# Altium PCB Power Board rev5.PcbDoc (part 1 of 2)
Units mil, origin at the board's own origin, x right, y up, seen from the top; angles counter-clockwise.
Board outline 3457.32 x 5639.92 mil, 2 copper layers (Top Layer, Bottom Layer); 95 components, 85 nets, 338 pads, 132 vias.
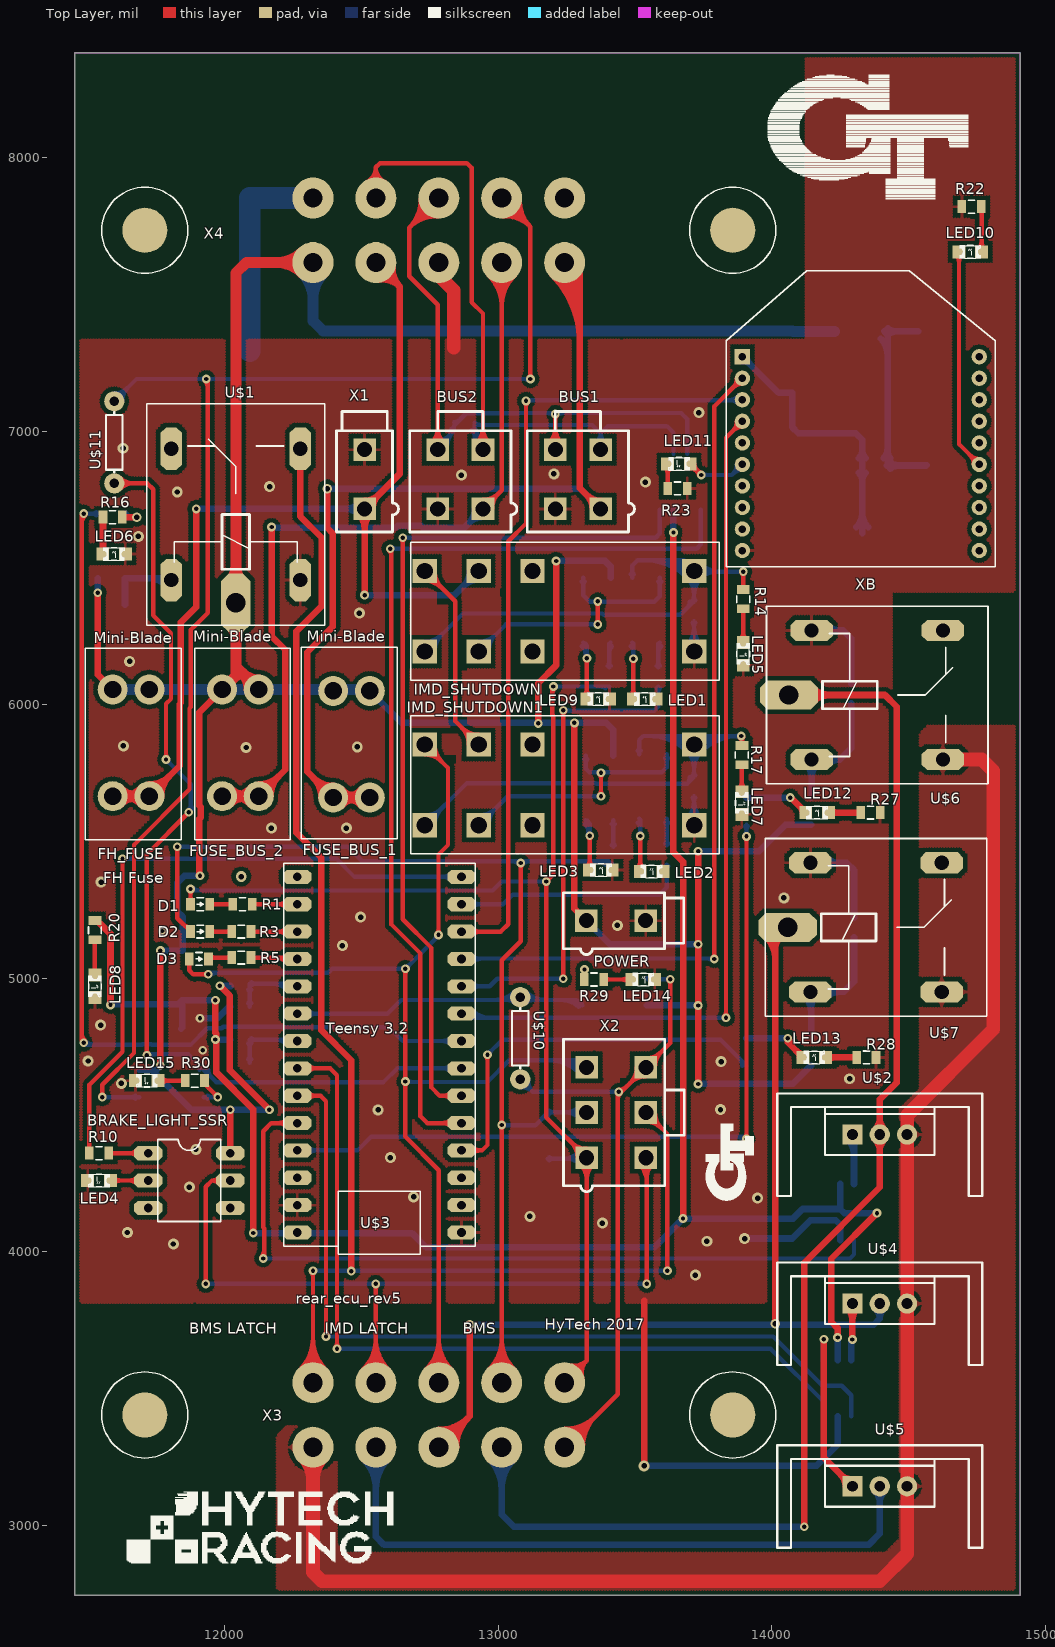
[diagram p0: Top Layer view]
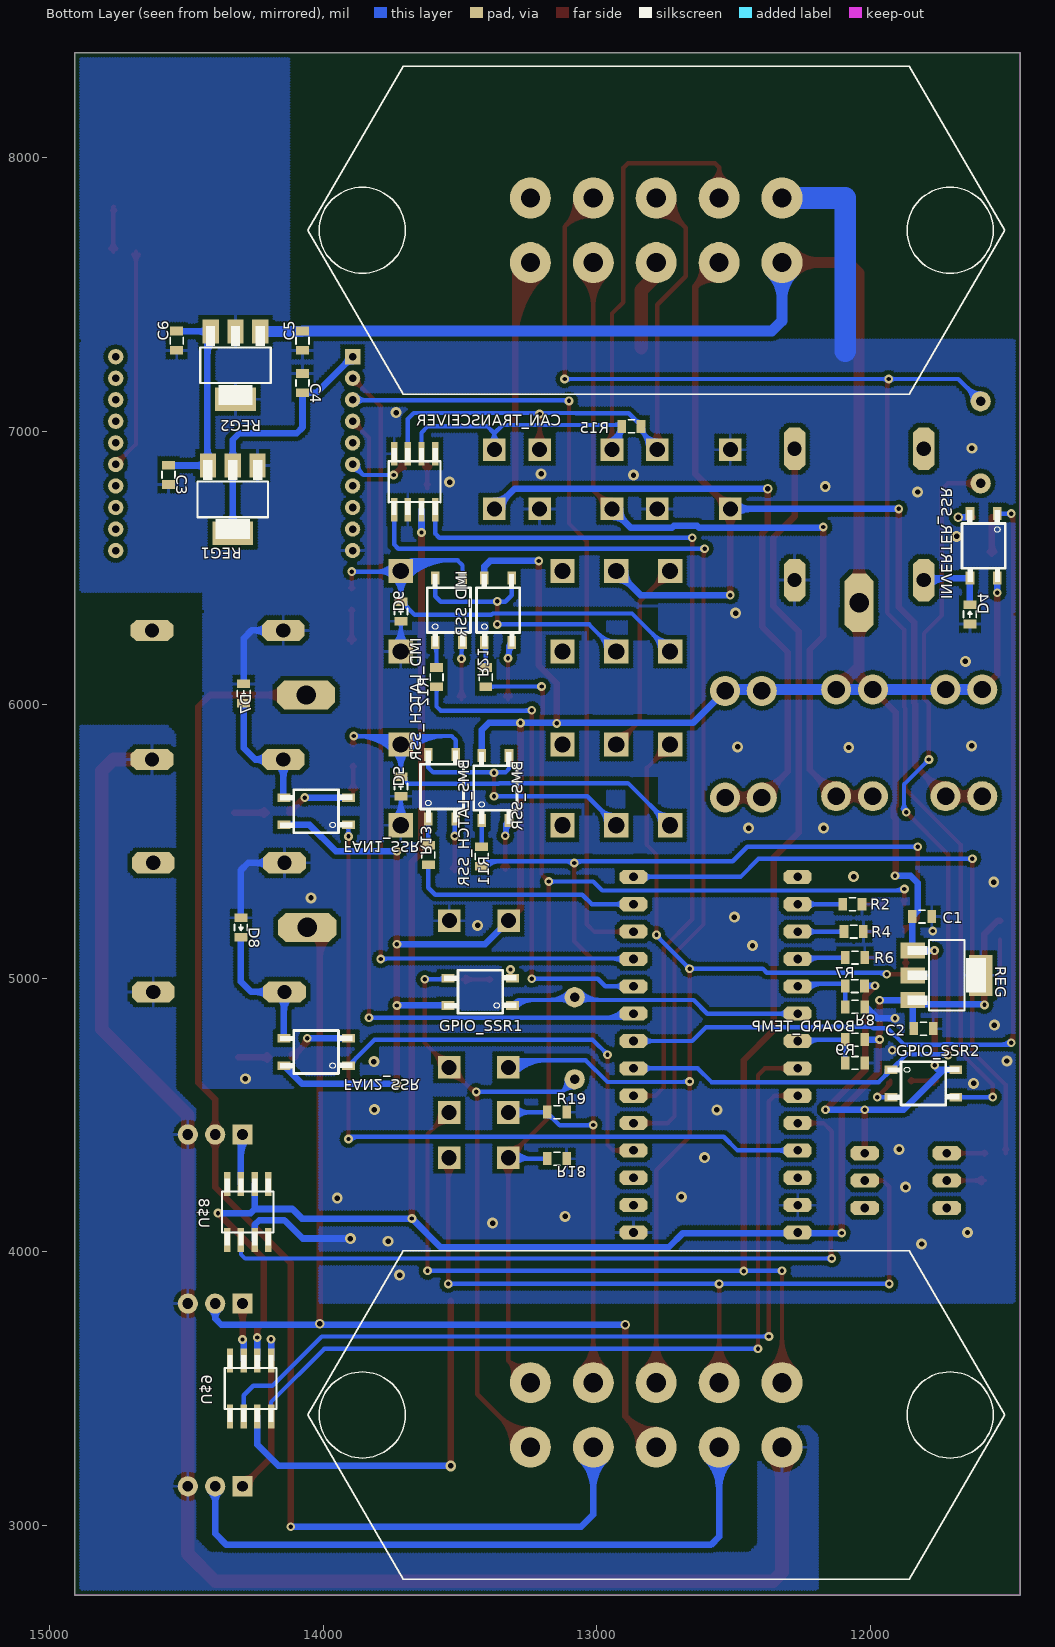
[diagram p1: Bottom Layer view, seen from below]

## Layer stack, top to bottom
Top Solder: solder mask 0.4, Solder Resist, Dk 3.5
Top Layer: signal copper 1.4
Dielectric1: dielectric 12.6, FR-4, Dk 4.8
Bottom Layer: signal copper 1.4
Bottom Solder: solder mask 0.4, Solder Resist, Dk 3.5

## Board outline
11450.79,2743.39 14908.12,2743.39 14908.12,8383.32 11450.79,8383.32

## Design rules (kind name [scope] priority, off if disabled: settings)
Clearance [All] p1: gap=16
ComponentClearance [All] p1 off: gap=10 collisioncheckmode=3 verticalgap=10 showdistances=FALSE
FanoutControl Fanout_Small [All] p1 off: bgadir=Out bgaviamode=Centered fanoutstyle=Auto fanoutdirection=Alternating viagrid=1 // Protel DXP Scope 1 Expression Was: (CompPinCount < 5)   Fanout_Small (Default Rule)
FanoutControl Fanout_Default [All] p2: bgadir=Out bgaviamode=Centered fanoutstyle=Auto fanoutdirection=Alternating viagrid=1 // Fanout_Default (Default Rule)
FanoutControl Fanout_SOIC [All] p3 off: bgadir=Out bgaviamode=Centered fanoutstyle=Auto fanoutdirection=Alternating viagrid=1 // Protel DXP Scope 1 Expression Was: IsSOIC   Fanout_SOIC (Default Rule)
FanoutControl Fanout_BGA [All] p4 off: bgadir=Out bgaviamode=Centered fanoutstyle=Auto fanoutdirection=Alternating viagrid=1 // Protel DXP Scope 1 Expression Was: IsBGA   Fanout_BGA (Default Rule)
FanoutControl Fanout_LCC [All] p5 off: bgadir=Out bgaviamode=Centered fanoutstyle=Auto fanoutdirection=Alternating viagrid=1 // Protel DXP Scope 1 Expression Was: IsLCC   Fanout_LCC (Default Rule)
Height [All] p1 off: minheight=0 maxheight=1000 prefheight=500
MinimumSolderMaskSliver [All] p1 off: minsoldermaskwidth=10
PolygonConnect [All] p1 off: connectstyle=Direct reliefconductorwidth=10 reliefentries=4 polygonreliefangle="90 Angle" airgapwidth=10 // Protel DXP Scope 2 Expression Was: isvia+InNamedPolygon('top layer-gnd')
RoutingVias [All] p1: holewidth=28 width=50 viastyle="Through Hole" minholewidth=16 minwidth=32 maxholewidth=28 maxwidth=50
SilkToSilkClearance [All] p1 off: silktosilkclearance=10
SilkToSolderMaskClearance SilkscreenOverComponentPads [IsPad] p1 off: minsilkscreentomaskgap=10 clearancetoexposedcopper=TRUE
SolderMaskExpansion [All] p1: expansion=4
Width [All] p1: maxlimit=100 minlimit=10 preferedwidth=16
20 further rules are at their usual default settings.

## Components (designator, comment, footprint, x,y, rotation, side; value= is the part's Value field where it differs from the comment)
BMS_LATCH_SSR "CPC1002N" SOP04 13565,5700 r180 bottom
BMS_SSR "CPC1002N" SOP04 13370,5695 r180 bottom
BOARD_TEMP "THERMISTOR_NCP21" 0805 12055,4775 r0 bottom
BRAKE_LIGHT_SSR "SOLID_STATE_RELAY_VO14642AT" DIL06 11870,4260 r270 top
BUS1 "CONNECTOR-4" MINIFIT_5566-4 13290.95,6823.55 r0 top
BUS2 "CONNECTOR-4" MINIFIT_5566-4 12860.95,6823.55 r0 top
C1 ".22uF" 0805 11810,5225 r0 bottom
C2 ".1uF" 0805 11805,4815 r0 bottom
C3 "1uF" 0805 14565,6840 r270 bottom
C4 "1uF" 0805 14075,7175 r270 bottom
C5 ".22uF" 0805 14075,7330 r90 bottom
C6 ".1uF" 0805 14535,7330 r90 bottom
CAN_TRANSCEIVER "MCP2551" SOIC-08 13665,6815 r0 bottom
D1 "DIODE0805" 0805_D 11910,5270 r0 top
D2 "DIODE0805" 0805_D 11910,5170 r0 top
D3 "DIODE0805" 0805_D 11905,5070 r0 top
D4 "DIODE0805" 0805_D 11635,6330 r90 bottom
D5 "DIODE0805" 0805_D 13715,5700 r90 bottom
D6 "DIODE0805" 0805_D 13715,6340 r90 bottom
D7 "DIODE0805" 0805_D 14290,6040 r270 bottom
D8 "DIODE0805" 0805_D 14300,5185 r270 bottom
FAN1_SSR "CPC1002N" SOP04 14025,5610 r90 bottom
FAN2_SSR "CPC1002N" SOP04 14025,4730 r90 bottom
FH_FUSE "Comment" MINI-BLADE_FUSE_HOLDER 11590,6055 r270 top
FUSE_BUS_1 "Comment" MINI-BLADE_FUSE_HOLDER 12530,5660 r90 top
FUSE_BUS_2 "Comment" MINI-BLADE_FUSE_HOLDER 11990,6055 r270 top
GPIO_SSR1 "CPC1002N" SOP04 13425,4950 r90 bottom
GPIO_SSR2 "CPC1002N" SOP04 11805,4615 r270 bottom
IMD_LATCH_SSR "CPC1002N" SOP04 13540,6345 r180 bottom
IMD_SHUTDOWN "Comment" G2RL-2 12730.95,6193.55 r0 top
IMD_SHUTDOWN1 "Comment" G2RL-2 12730.95,5558.55 r0 top
IMD_SSR "CPC1002N" SOP04 13360,6345 r180 bottom
INVERTER_SSR "CPC1002N" SOP04 11585,6580 r0 bottom
LED1 "Comment" LED-805 13535,6020 r270 top
LED2 "Comment" LED-805 13560,5390 r270 top
LED3 "Comment" LED-805 13375,5395 r270 top
LED4 "Comment" LED-805 11540,4260 r90 top
LED5 "Comment" LED-805 13895,6185 r180 top
LED6 "Comment" LED-805 11595,6550 r270 top
LED7 "Comment" LED-805 13890,5640 r180 top
LED8 "Comment" LED-805 11525,4970 r180 top
LED9 "Comment" LED-805 13365,6020 r270 top
LED10 "Comment" LED-805 14725,7655 r270 top
LED11 "Comment" LED-805 13660,6880 r90 top
LED12 "Comment" LED-805 14165,5605 r270 top
LED13 "Comment" LED-805 14155,4710 r270 top
LED14 "Comment" LED-805 13530,4995 r270 top
LED15 "Comment" LED-805 11715,4625 r90 top
POWER "CONNECTOR-2" MINIFIT_5566-2 13430,5210 r270 top
R1 "43k" 0805 12065,5270 r0 top
R2 "12k" 0805 12065,5270 r180 bottom
R3 "43k" 0805 12060,5170 r0 top
R4 "12k" 0805 12060,5170 r180 bottom
R5 "43k" 0805 12060,5075 r0 top
R6 "12k" 0805 12055,5075 r180 bottom
R7 "43k" 0805 12056,4971 r0 bottom
R8 "12k" 0805 12055,4895 r180 bottom
R9 "10k" 0805 12055,4690 r0 bottom
R10 "100" 0805 11540,4360 r180 top
R11 "100" 0805 13420,5445 r270 bottom
R12 "100" 0805 13585,6100 r270 bottom
R13 "100" 0805 13615,5450 r90 bottom
R14 "820" 0805 13895,6385 r270 top
R15 "120" 0805 12873,7017 r0 bottom
R16 "100" 0805 11590,6685 r180 top
R17 "820" 0805 13890,5815 r270 top
R18 "2.2k" 0805 13145,4340 r180 bottom
R19 "10k" 0805 13145,4510 r180 bottom
R20 "270" 0805 11525,5175 r270 top
R21 "680" 0805 13405,6100 r90 bottom
R22 "82" 0805 14730,7820 r0 top
R23 "20" 0805 13655,6790 r180 top
R27 "Comment" 0805 14360,5605 r0 top
R28 "Comment" 0805 14345,4710 r0 top
R29 "120" 0805 13350,4995 r0 top
R30 "120" 0805 11890,4625 r180 top
REG "5V" SOT223 11720,5010 r270 bottom
REG1 "TLV1117LV33" SOT223 14330,6750 r0 bottom
REG2 "5V" SOT223 14320,7240 r0 bottom
U$1 "G5LE" ZF112 12390,6295 r90 top
U$2 "Comment" TO-220-SINK 14394.18,4428.28 r0 top
U$3 "Comment" TEENSY_3.2_SIMPLE 12915,5420 r180 top
U$4 "Comment" TO-220-SINK 14394.18,3810.24 r0 top
U$5 "Comment" TO-220-SINK 14394.18,3142.21 r0 top
U$6 "G5LE" ZF112 13985,5685 r0 top
U$7 "G5LE" ZF112 13980.63,4835.36 r0 top
U$8 "MC34152" SOIC-08 14275,4145 r0 bottom
U$9 "MC34152" SOIC-08 14265,3500 r0 bottom
U$10 "JUMPER.3" AXIAL-0.3 13080,4780 r270 top
U$11 "JUMPER.3" AXIAL-0.3 11595.95,6958.55 r90 top
X1 "CONNECTOR-2" MINIFIT_5566-2 12510.95,6823.55 r0 top
X2 "CONNECTOR-6" MINIFIT_5566-6 13430.95,4508.55 r270 top
X3 "Comment" MX150L_VERTICAL-10 12782.05,3403 r0 bottom locked
X4 "Comment" MX150L_VERTICAL-10 12782.05,7733.71 r180 bottom locked
XB "Comment" XBEE 14324.96,7055.05 r0 top locked

## Footprints (in the part's own frame and the unit in brackets; to place one, negate y for a bottom-side part, rotate by r counter-clockwise, add the part's x,y. Pads: shape width x height; smd on the part's side, far side on the other; paste and mask are expansions set on the pad)
0805 [mm]
  rect 0.8x1.2 smd: 1(-0.9,0) 2(0.9,0)
  silkscreen extent -0.3,-0.6 0.3,0.6
0805_D [mm]
  rect 0.8x1.2 smd: A(-0.9,0) C(0.9,0)
  silkscreen extent -0.3,-0.6 0.3,0.6
AXIAL-0.3 [mil]
  round 74 hole 35.43: P$1(-150,0) P$2(150,0)
  silkscreen extent -110,-30 110,30
DIL06 [mil]
  oct 52x104 hole 32: 1(-100,-150) 2(0,-150) 3(100,-150) 4(100,150) 5(0,150) 6(-100,150)
  silkscreen extent -150,-115 150,115
G2RL-2 [mm]
  rect 2.25x2.25 hole 1.5: 2(10.008,0) 3(5.004,0) 4(0,0) 5(0,7.493) 6(5.004,7.493) 7(10.008,7.493) COIL+(25.019,0) COIL-(25.019,7.493)
  silkscreen extent -1.3,-2.65 27.36,10.16
LED-805 [mm]
  rect 1.2x1.2 smd: A(0,-1.05) C(0,1.05)
  silkscreen extent -0.63,-1.01 0.62,1
MINI-BLADE_FUSE_HOLDER [mil]
  round 110 hole 63.5: L1(0,134) L2(0,0) R1(390,134) R2(390,0)
  silkscreen extent -150,-100 550,250
MINIFIT_5566-2 [mm]
  rect 2.1x2.1 hole 1.4: 1(0,-2.75) 2(0,2.75)
  silkscreen extent -2.6,-4.9 3.15,6.3
MINIFIT_5566-4 [mm]
  rect 2.1x2.1 hole 1.4: 1(2.1,-2.75) 2(-2.1,-2.75) 3(2.1,2.75) 4(-2.1,2.75)
  silkscreen extent -4.7,-4.9 5.25,6.3
MINIFIT_5566-6 [mm]
  rect 2.1x2.1 hole 1.4: 1(4.2,-2.75) 2(0,-2.75) 3(-4.2,-2.75) 4(4.2,2.75) 5(0,2.75) 6(-4.2,2.75)
  silkscreen extent -6.8,-4.9 7.35,6.3
MX150L_VERTICAL-10 [mil]
  round 150 hole 70: 1(460,-118) 2(230,-118) 3(0,-118) 4(-230,-118) 5(-460,-118) 6(460,118) 7(230,118) 8(0,118) 9(-230,118) 10(-460,118)
  round 165 smd far side: ""(-1074.5,0) ""(1074.5,0)
  silkscreen extent -1274,-600 1274,600
SOIC-08 [mm]
  rect 0.6x2.2 smd: 1(1.905,2.6) 2(0.635,2.6) 3(-0.635,2.6) 4(-1.905,2.6) 5(-1.905,-2.6) 6(-0.635,-2.6) 7(0.635,-2.6) 8(1.905,-2.6)
  silkscreen extent -2.4,-3.1 2.4,3.09
SOP04 [mm]
  rect 0.8x1.2 smd: 1(-1.27,-3) 2(1.27,-3) 3(1.27,3) 4(-1.27,3)
  silkscreen extent -2,-3.35 2,3.35
SOT223 [mm]
  rect 1.5x2.235 smd: 1(-2.3,-3.15) 2(0,-3.15) 3(2.3,-3.15)
  rect 3.8x2.2 smd: 4(0,3.15)
  silkscreen extent -3.28,-3.66 3.28,3.66
TEENSY_3.2_SIMPLE [mm]
  oct 2.616x1.308 hole 0.8: 3.3V(16.51,29.21) A0(16.51,3.81) A1(16.51,6.35) A2(16.51,8.89) A3(16.51,11.43) A4(16.51,13.97) A5(16.51,16.51) A6(16.51,19.05) A7(16.51,21.59) A8(16.51,24.13) A9(16.51,26.67) AGND(16.51,31.75) D0(RX1)(1.27,31.75) D1(TX1)(1.27,29.21) D2(1.27,26.67) D3(CANTX)(1.27,24.13) D4(CANRX)(1.27,21.59) D5(1.27,19.05) D6(1.27,16.51) D7(RX3)(1.27,13.97) D8(TX3)(1.27,11.43) D9(RX2)(1.27,8.89) D10(TX2)(1.27,6.35) D11(1.27,3.81) D12(1.27,1.27) D13(16.51,1.27) GND(1.27,34.29) VIN(16.51,34.29)
  silkscreen extent 0,0 17.78,36.32
TO-220-SINK [mil]
  rect 74x74 hole 39.37: 1(-100,0)
  round 74 hole 39.37: 2(0,0) 3(100,0)
  silkscreen extent -375,-225 375,150
XBEE [mil]
  rect 56x56 hole 27.56: 1(-433.07,216.53)
  round 56 hole 27.56: 2(-433.07,137.79) 3(-433.07,59.05) 4(-433.07,-19.69) 5(-433.07,-98.43) 6(-433.07,-177.17) 7(-433.07,-255.91) 8(-433.07,-334.65) 9(-433.07,-413.39) 10(-433.07,-492.13) 11(433.07,-492.13) 12(433.07,-413.39) 13(433.07,-334.65) 14(433.07,-255.91) 15(433.07,-177.17) 16(433.07,-98.43) 17(433.07,-19.69) 18(433.07,59.05) 19(433.07,137.79) 20(433.07,216.53)
  silkscreen extent -492,-551 492,531
ZF112 [mil]
  oct 156x78 hole 52: 1(160,586) 2(160,114) O(640,586) S(640,114)
  oct 213x106.5 hole 71: P(77,350)
  silkscreen extent -5,25 805,675

## Via types
v1: diameter 32, hole 16, Top Layer to Bottom Layer, 87 vias
v2: diameter 40, hole 20, Top Layer to Bottom Layer, 41 vias
v3: diameter 35, hole 20, Top Layer to Bottom Layer, 4 vias

## Nets (pads, with @x,y where several pads share a name; then routed paths per layer and width w, separated by ;. In a path a pad name is that pad's centre, name@x,y a point inside that pad or via, vN(x,y) a via of type N, cw(c..) or ccw(c..) an arc to the next point about the centre after c; other vN are vias at no path point)
12V_F1: BUS1.1 FUSE_BUS_1.L1 FUSE_BUS_1.L2 X4.5 | length 5143.1
  Top Layer w24: FUSE_BUS_1.L1@12353,5660 ccw(c12249.19,5660) 12322.59,5733.41 ccw(c12396,5806.81) FUSE_BUS_1.L1@12396,5703 ; v3(12374,6789) 12374,6646.57 12394,6626.57 12394,6284 12301,6191 12301,5755 FUSE_BUS_1.L1@12396,5660 FUSE_BUS_1.L2@12530,5660 ; FUSE_BUS_1.L1@12426.41,5629.59 cw(c12499.81,5556.19) 12499.81,5660 cw(c12499.81,5763.81) FUSE_BUS_1.L1@12426.41,5690.41 ; FUSE_BUS_1.L1@12432.25,5636.87 cw(c12457.32,5620.86) 12465.02,5649.59 cw(c12476.14,5691.09) FUSE_BUS_1.L1@12436.09,5675.55 ; FUSE_BUS_1.L1@12432.25,5683.13 ccw(c12457.32,5699.14) 12465.02,5670.41 ccw(c12476.14,5628.91) FUSE_BUS_1.L1@12436.09,5644.45 ; FUSE_BUS_1.L2@12499.59,5629.59 ccw(c12426.19,5556.19) 12426.19,5660 ccw(c12426.19,5763.81) FUSE_BUS_1.L2@12499.59,5690.41 ; X4.5@13197.5,7571.16 cw(c12954.88,7328.54) 13298,7328.54 ; X4.5@13214.47,7588.13 cw(c13012.82,7386.48) 13298,7386.48 ; X4.5@13231.44,7605.1 cw(c13070.76,7444.42) 13298,7444.42 ; X4.5@13242.05,7615.71 13298,7559.76 ; X4.5@13248.41,7622.07 cw(c13128.7,7502.36) 13298,7502.36 ; X4.5@13265.38,7639.04 cw(c13186.64,7560.3) 13298,7560.3 ; X4.5@13275.49,7562.32 cw(c13285.14,7546.9) 13298,7559.76 ; X4.5@13295.44,7582.27 ccw(c13310.86,7572.62) 13298,7559.76 ; BUS1.1@13344.28,6715.28 ccw(c13273.45,6715.28) 13323.54,6765.36 ccw(c13373.62,6815.45) BUS1.1@13373.62,6744.62 ; BUS1.1@13373.62,6715.28 13298,6790.9 13298,7559.76
  Bottom Layer w24: v3(12374,6789) 13299.9,6789 BUS1.1@13373.62,6715.28 ; BUS1.1@13344.28,6715.28 ccw(c13273.45,6715.28) 13323.54,6765.36 ccw(c13373.62,6815.45) BUS1.1@13373.62,6744.62
12V_F2: BUS2.1 FUSE_BUS_2.R1 FUSE_BUS_2.R2 X4.4 | length 4461.5
  Top Layer w16: BUS2.1@12943.62,6715.28 13012.05,6783.71 X4.4@13012.05,7615.71 ; BUS2.1@12943.62,6732.62 ccw(c12943.62,6774.48) 12973.22,6744.88 ccw(c13002.82,6715.28) BUS2.1@12960.96,6715.28 ; BUS2.1@12943.62,6748.62 ccw(c12943.62,6829.11) 13000.53,6772.19 ccw(c13057.45,6715.28) BUS2.1@12976.96,6715.28 ; X4.4@12964.67,7568.33 cw(c12850.3,7453.96) 13012.05,7453.96 cw(c13173.8,7453.96) X4.4@13059.43,7568.33 ; X4.4@12975.99,7579.65 cw(c12888.93,7492.59) 13012.05,7492.59 cw(c13135.17,7492.59) X4.4@13048.11,7579.65 ; X4.4@12987.3,7590.96 cw(c12927.55,7531.21) 13012.05,7531.21 cw(c13096.55,7531.21) X4.4@13036.8,7590.96
  Top Layer w24: FUSE_BUS_2.R2@11990,5665 FUSE_BUS_2.R1@12124,5665 12221,5762 12221,6200 12171,6250 v1(12171,6649) ; FUSE_BUS_2.R2@12020.41,5634.59 cw(c12093.81,5561.19) 12093.81,5665 cw(c12093.81,5768.81) FUSE_BUS_2.R2@12020.41,5695.41 ; FUSE_BUS_2.R1@12083.91,5649.45 ccw(c12043.86,5633.91) 12054.98,5675.4 ccw(c12062.68,5704.14) FUSE_BUS_2.R1@12087.75,5688.13 ; FUSE_BUS_2.R1@12083.91,5680.55 cw(c12043.86,5696.09) 12054.98,5654.6 cw(c12062.68,5625.86) FUSE_BUS_2.R1@12087.75,5641.87 ; FUSE_BUS_2.R1@12093.59,5634.59 ccw(c12020.19,5561.19) 12020.19,5665 ccw(c12020.19,5768.81) FUSE_BUS_2.R1@12093.59,5695.41 ; FUSE_BUS_2.R1@12124,5708 ccw(c12124,5811.81) 12197.41,5738.41 ccw(c12270.81,5665) FUSE_BUS_2.R1@12167,5665
  Bottom Layer w24: v1(12171,6649) 12174.06,6645.94 12623.72,6645.94 12631.77,6654 12717.27,6654 12725.33,6645.94 12874.28,6645.94 BUS2.1@12943.62,6715.28 ; v1@12173.83,6651.83 ccw(c12188.04,6666.04) 12188.04,6645.94 ; BUS2.1@12914.28,6715.28 cw(c12843.45,6715.28) 12893.54,6665.2 cw(c12943.62,6615.11) BUS2.1@12943.62,6685.94
12VSUPPLY_BRB: FH_FUSE.R1 FH_FUSE.R2 IMD_SHUTDOWN.6 X1.1 X4.2 | length 5011
  Top Layer w24: FH_FUSE.R2@11590,5665 FH_FUSE.R1@11724,5665 11835,5776 11835,6001.82 11839,6005.82 11839,6300 11895.28,6356.28 v1(11895.28,6715.28) ; FH_FUSE.R2@11620.41,5634.59 cw(c11693.81,5561.19) 11693.81,5665 cw(c11693.81,5768.81) FH_FUSE.R2@11620.41,5695.41 ; FH_FUSE.R1@11683.91,5649.45 ccw(c11643.86,5633.91) 11654.98,5675.4 ccw(c11662.68,5704.14) FH_FUSE.R1@11687.75,5688.13 ; FH_FUSE.R1@11683.91,5680.55 cw(c11643.86,5696.09) 11654.98,5654.6 cw(c11662.68,5625.86) FH_FUSE.R1@11687.75,5641.87 ; FH_FUSE.R1@11693.59,5634.59 ccw(c11620.19,5561.19) 11620.19,5665 ccw(c11620.19,5768.81) FH_FUSE.R1@11693.59,5695.41 ; FH_FUSE.R1@11724,5708 ccw(c11724,5811.81) 11797.41,5738.41 ccw(c11870.81,5665) FH_FUSE.R1@11767,5665 ; X1.1@12490.2,6694.53 cw(c12440.12,6644.45) 12510.95,6644.45 cw(c12581.78,6644.45) X1.1@12531.7,6694.53 ; v1(12510.95,6400.05) X1.1@12510.95,6715.28 12640,6844.33 12640,7527.76 ; X1.1@12510.95,6744.62 ccw(c12510.95,6815.45) 12561.03,6765.36 ccw(c12611.12,6715.28) X1.1@12540.29,6715.28 ; X4.2@12552.05,7615.71 12640,7527.76 ; X4.2@12557.97,7577.16 cw(c12566.54,7521.32) 12606.49,7561.27 cw(c12646.44,7601.22) X4.2@12590.6,7609.79 ; X4.2@12561.61,7553.44 cw(c12575.46,7463.23) 12640,7527.76 ; X4.2@12614.32,7606.15 ccw(c12704.53,7592.3) 12640,7527.76
  Bottom Layer w24: FH_FUSE.R2@11590,5665 FH_FUSE.R2@11591.72,5666.72 ; v1(11895.28,6715.28) X1.1@12510.95,6715.28 ; X1.1@12490.2,6694.53 ccw(c12440.12,6644.45) 12440.12,6715.28 ccw(c12440.12,6786.11) X1.1@12490.2,6736.03 ; v1(12510.95,6400.05) 12839.45,6400.05 IMD_SHUTDOWN.6@12927.95,6488.55 ; IMD_SHUTDOWN.6@12895.66,6488.55 cw(c12817.7,6488.55) 12872.83,6433.43 cw(c12927.95,6378.3) IMD_SHUTDOWN.6@12927.95,6456.26
12VSUPPLY_READ: R7.2 R8.1 U$3.A3 | length 442.5
  Bottom Layer w16: R8.1@12084.95,4908.35 ccw(c12071.72,4921.58) 12090.43,4921.58 ccw(c12109.14,4921.58) R8.1@12095.91,4908.35 ; R7.2@12085.95,4957.65 cw(c12075.14,4946.83) 12090.43,4946.83 ; R8.1@12090.43,4895 12090.43,4980 12255,4980 U$3.A3@12265,4970 ; 12090.43,4942.01 cw(c12112.55,4942.01) R7.2@12096.91,4957.65 ; R7.2@12096.91,4973.4 cw(c12112.85,4957.45) 12112.85,4980 ; R7.2@12096.91,4984.35 ccw(c12107.42,4994.86) 12107.42,4980 ; 12172.26,4980 cw(c12172.26,4903.01) U$3.A3@12226.7,4957.45 ; 12210.89,4980 cw(c12210.89,4941.64) U$3.A3@12238.02,4968.76
+5V: BOARD_TEMP.1 C2.2 CAN_TRANSCEIVER.3 R20.1 REG.3 U$3.VIN U$8.6 U$9.6 | length 7478
  Top Layer w24: R20.1@11525,5210.43 11533.11,5210.43 11582,5161.54 v1(11582,4902) ; v1(11965.45,4919.45) 11965.45,4800 11969.18,4796.27 11969.18,4654.82 12104,4520 v1(12104,4068) ; v1(13640,6629) 13640,5460 13675,5425 v1(13675,4121) ; v1(14240,3686) 14240,3721 14217,3744 14217,3974 v1(14384,4141)
  Bottom Layer w24: v1(11582,4902) 11585,4905 11829.56,4905 REG.3@11844.01,4919.45 ; C2.2@11840.43,4815 11844.01,4818.58 REG.3@11844.01,4919.45 ; v1(11965.45,4775.55) 11966,4775 BOARD_TEMP.1@12019.57,4775 ; v1(11965.45,4919.45) REG.3@11844.01,4919.45 ; v1(12104,4068) 12684,4068 12735.75,4016.25 13570.25,4016.25 v1(13675,4121) 14077,4121 14112,4156 14249,4156 14250,4155 ; v1(13640,6629) CAN_TRANSCEIVER.3@13640,6712.64 ; U$9.6@14240,3602.36 v1(14240,3686) ; U$8.6@14250,4247.36 14250,4155 ; v1(14384,4141) 14264,4141 14250,4155
+12V: BMS_SSR.4 BRAKE_LIGHT_SSR.6 C1.2 C5.2 FAN1_SSR.4 FAN2_SSR.4 FH_FUSE.L1 FH_FUSE.L2 FUSE_BUS_1.R1 FUSE_BUS_1.R2 FUSE_BUS_2.L1 FUSE_BUS_2.L2 GPIO_SSR1.4 GPIO_SSR2.4 IMD_SSR.4 INVERTER_SSR.4 POWER.1 R7.1 REG2.1 REG.1 U$1.P X4.1 | length 14169.7
  Top Layer w24: v1(11535,6409) 11535,6110 FH_FUSE.L2@11590,6055 ; v1(11764,4681) 11764.45,4681.45 v1(11764.45,5100.55) ; v1(11909,5374) 11907,5372 11907,5582.77 11912.71,5588.48 11912.71,5624.91 11907,5630.62 11907,5972 FUSE_BUS_2.L2@11990,6055 ; v1(11982,4972) 12018,4936 12018,4664 v1(12163,4519) ; BRAKE_LIGHT_SSR.6@12020,4360 v1(12020,4519) ; v1(13146,5931) 13146,6078 13211,6143 v1(13211,6525) ; v1(13278,5933) 13278,5253.73 POWER.1@13321.73,5210 ; v1(13730,4613) v1(13730,4900) v1(13730,5124) v1(13730,5464)
  Top Layer w40: FUSE_BUS_2.L2@11990,6055 12040,6105 12040,6139 ; U$1.P@12016.49,6295.24 cw(c11959.73,6238.48) 12040,6238.48 cw(c12120.27,6238.48) U$1.P@12063.51,6295.24 ; U$1.P@12016.49,6448.76 ccw(c11959.73,6505.52) 12040,6505.52 ccw(c12120.27,6505.52) U$1.P@12063.51,6448.76 ; FUSE_BUS_2.L1@12089,6055 ccw(c12004.5,6055) 12064.25,6114.75 ccw(c12124,6174.5) FUSE_BUS_2.L1@12124,6090 ; FUSE_BUS_2.L1@12124,6055 12040,6139 ; X4.1@12283.16,7576.82 ccw(c12189.27,7482.93) 12189.27,7615.71 ccw(c12189.27,7748.49) X4.1@12283.16,7654.6 ; X4.1@12322.05,7615.71 12078.71,7615.71 12040,7577 U$1.P@12040,6372 12040,6139
  Bottom Layer w24: v1(11535,6409) INVERTER_SSR.4@11535,6461.89 ; GPIO_SSR2.4@11686.89,4665 11732,4665 ; v1(11764,4681) 11764,4677.62 11751.38,4665 11732,4665 ; v1(11764.45,5100.55) REG.1@11844.01,5100.55 11845.43,5101.97 C1.2@11845.43,5225 11826,5244.43 11826,5348 11852,5374 v1(11909,5374) ; v1(11982,4972) 12019.57,4972 R7.1@12020.57,4971 ; v1(12163,4519) v1(12020,4519) 11878,4519 11732,4665 ; FUSE_BUS_1.R2@12530,6050 12647,5933 v1(13278,5933) 13394,5933 13420,5907 BMS_SSR.4@13420,5813.11 ; v1(13211,6525) 13390,6525 13410,6505 IMD_SSR.4@13410,6463.11 ; POWER.1@13321.73,5210 13407.73,5124 v1(13730,5124) ; GPIO_SSR1.4@13543.11,4900 v1(13730,4900) ; v1(13730,4613) 14076.11,4613 FAN2_SSR.4@14143.11,4680 ; v1(13730,5464) 13953,5464 14049,5560 FAN1_SSR.4@14143.11,5560
  Bottom Layer w40: FH_FUSE.L2@11590,6055 FH_FUSE.L1@11724,6055 FUSE_BUS_2.L2@11990,6055 FUSE_BUS_2.L1@12124,6055 FUSE_BUS_1.R2@12525,6055 ; X4.1@12283.16,7576.82 cw(c12189.27,7482.93) 12322.05,7482.93 cw(c12454.83,7482.93) X4.1@12360.94,7576.82 ; X4.1@12322.05,7615.71 12322.05,7402.95 12359.57,7365.43 C5.2@14075,7365.43 14076.42,7364.01 REG2.1@14229.45,7364.01
BMS_COIL_PWR: BMS_LATCH_SSR.3 D5.C IMD_SHUTDOWN1.4 IMD_SHUTDOWN1.COIL- R17.1 | length 3192.1
  Top Layer w16: v1@13882.34,5879.34 cw(c13863.86,5860.86) R17.1@13890,5860.86 ; R17.1@13884.52,5855.91 ccw(c13871.29,5869.14) 13890,5869.14 ccw(c13908.71,5869.14) R17.1@13895.48,5855.91 ; v1(13888,5885) 13890,5883 R17.1@13890,5850.43 ; R17.1@13891.53,5863.42 cw(c13911.19,5868.69) v1@13894.54,5880.4
  Bottom Layer w16: IMD_SHUTDOWN1.4@12730.95,5558.55 12885.4,5713 13356.43,5713 13358.43,5711 13690.57,5711 ; IMD_SHUTDOWN1.4@12730.95,5578.84 ccw(c12730.95,5627.83) 12765.59,5593.19 ccw(c12800.23,5558.55) IMD_SHUTDOWN1.4@12751.24,5558.55 ; IMD_SHUTDOWN1.4@12730.95,5594.84 ccw(c12730.95,5682.46) 12792.9,5620.5 ccw(c12854.86,5558.55) IMD_SHUTDOWN1.4@12767.24,5558.55 ; BMS_LATCH_SSR.3@13509.52,5831.46 ccw(c13496.29,5844.69) 13515,5844.69 ccw(c13533.71,5844.69) BMS_LATCH_SSR.3@13520.48,5831.46 ; BMS_LATCH_SSR.3@13515,5818.11 13515,5870 13530,5885 IMD_SHUTDOWN1.COIL-@13684.5,5885 ; 13552.41,5885 cw(c13552.41,5690.01) 13690.29,5827.89 cw(c13630.63,5768.23) 13715,5768.23 ; 13591.04,5885 cw(c13591.04,5728.64) 13701.6,5839.2 cw(c13669.26,5806.86) 13715,5806.86 ; 13629.66,5885 cw(c13629.66,5767.26) IMD_SHUTDOWN1.COIL-@13712.92,5850.52 ; 13668.29,5885 cw(c13668.29,5805.89) IMD_SHUTDOWN1.COIL-@13724.23,5861.83 ; D5.C@13699.4,5734.84 cw(c13669.04,5732.53) 13690.57,5711 ; IMD_SHUTDOWN1.COIL-@13707.67,5861.83 cw(c13763.61,5805.89) 13763.61,5885 ; D5.C@13709.52,5740.91 ccw(c13696.29,5754.14) 13715,5754.14 ccw(c13733.71,5754.14) D5.C@13720.48,5740.91 ; 13715,5763.64 cw(c13805.86,5763.64) 13741.61,5827.89 cw(c13879.49,5690.01) v1@13879.49,5885 ; 13715,5802.27 cw(c13767.23,5802.27) 13730.3,5839.2 cw(c13840.86,5728.64) 13840.86,5885 ; IMD_SHUTDOWN1.COIL-@13718.98,5850.52 cw(c13802.24,5767.26) 13802.24,5885 ; 13865.82,5883.03 cw(c13869.15,5859.83) v1@13883.21,5878.6 ; 13871.6,5883.87 ccw(c13869.44,5898.89) v1@13881.6,5889.79 ; v1@13882.34,5879.34 ccw(c13868.69,5865.69) 13868.69,5885 ccw(c13868.69,5904.31) v1@13882.34,5890.66 ; v1(13888,5885) IMD_SHUTDOWN1.COIL-@13684.5,5885 ; IMD_SHUTDOWN1.COIL-@13684.5,5885 IMD_SHUTDOWN1.COIL-@13715.95,5853.55 13715,5852.6 D5.C@13715,5735.43 13690.57,5711
BMS_LATCH_CTRL: R13.1 U$3.D11 | length 956.1
  Bottom Layer w16: U$3.D11@12865,5270 13017,5270 13052,5305 13590,5305 13615,5330 R13.1@13615,5414.57 ; U$3.D11@12903.3,5257.45 cw(c12933.6,5227.15) 12933.6,5270 cw(c12933.6,5312.85) U$3.D11@12903.3,5282.55 ; R13.1@13609.52,5409.09 cw(c13596.29,5395.86) 13615,5395.86 cw(c13633.71,5395.86) R13.1@13620.48,5409.09
BMS_OK: D2.A R11.2 R19.1 X2.2 X3.2 | length 5394.7
  Top Layer w16: v1@11820.34,5474.34 cw(c11806.69,5460.69) 11826,5460.69 cw(c11845.31,5460.69) v1@11831.66,5474.34 ; v1(11826,5480) 11826,5218.56 D2.A@11874.56,5170 ; 11847.89,5196.67 ccw(c11874.56,5223.34) D2.A@11874.56,5185.62 ; X3.2@12964.67,3568.38 ccw(c12850.3,3682.75) 13012.05,3682.75 ccw(c13173.8,3682.75) X3.2@13059.43,3568.38 ; X3.2@12975.99,3557.06 ccw(c12888.93,3644.12) 13012.05,3644.12 ccw(c13135.17,3644.12) X3.2@13048.11,3557.06 ; X3.2@12987.3,3545.75 ccw(c12927.55,3605.5) 13012.05,3605.5 ccw(c13096.55,3605.5) X3.2@13036.8,3545.75 ; v1@13006.39,4457.29 cw(c12992.74,4443.64) 13012.05,4443.64 cw(c13031.36,4443.64) v1@13017.71,4457.29 ; v1@13006.39,4468.61 ccw(c12992.74,4482.26) 13012.05,4482.26 ccw(c13031.36,4482.26) v1@13017.71,4468.61 ; X3.2@13012.05,3521 v1(13012.05,4462.95) 13012.05,5065.05 13082,5135 v1(13082,5421) ; v1@13076.34,5415.34 cw(c13062.69,5401.69) 13082,5401.69 cw(c13101.31,5401.69) v1@13087.66,5415.34
  Bottom Layer w16: v1(11826,5480) 12449,5480 12502,5427 13402.57,5427 ; v1@11831.66,5474.34 cw(c11845.31,5460.69) 11845.31,5480 cw(c11845.31,5499.31) v1@11831.66,5485.66 ; v1(13012.05,4462.95) 13012.62,4462.38 13135.26,4462.38 13180.43,4507.55 R19.1@13180.43,4510 13321.23,4510 X2.2@13322.68,4508.55 ; v1@13017.71,4457.29 cw(c13029.98,4445.02) 13029.98,4462.38 ; v1@13017.71,4468.61 ccw(c13032.74,4483.64) 13032.74,4462.38 ; 13048.2,5427 cw(c13048.2,5387.2) v1@13076.34,5415.34 ; v1@13087.66,5415.34 cw(c13115.8,5387.2) 13115.8,5427 ; 13157.95,4485.06 cw(c13180.43,4462.58) R19.1@13180.43,4494.38 ; R19.1@13185.91,4504.52 cw(c13199.14,4491.29) 13199.14,4510 cw(c13199.14,4528.71) R19.1@13185.91,4515.48 ; 13238.69,4510 cw(c13238.69,4424.56) X2.2@13299.11,4484.98 ; 13245.69,4510 ccw(c13245.69,4585.54) X2.2@13299.11,4532.12 ; 13277.32,4510 cw(c13277.32,4463.19) X2.2@13310.42,4496.29 ; 13351.34,5427 cw(c13351.34,5348.78) R11.2@13406.65,5404.09 ; 13389.97,5427 cw(c13389.97,5387.41) R11.2@13417.96,5415.41 ; R11.2@13405.09,5412.82 ccw(c13393.67,5418.1) 13402.57,5427 ; R11.2@13420,5409.57 13402.57,5427
BMS_OK_READ: R3.2 R4.1 U$3.A1 | length 532.5
  Top Layer w16: R3.2@12095.43,5170 U$3.A1@12265,5170 ; R3.2@12100.91,5164.52 cw(c12114.14,5151.29) 12114.14,5170 cw(c12114.14,5188.71) R3.2@12100.91,5175.48 ; U$3.A1@12226.7,5157.45 ccw(c12196.4,5127.15) 12196.4,5170 ccw(c12196.4,5212.85) U$3.A1@12226.7,5182.55
  Bottom Layer w16: R4.1@12095.43,5170 U$3.A1@12265,5170 ; R4.1@12100.91,5164.52 cw(c12114.14,5151.29) 12114.14,5170 cw(c12114.14,5188.71) R4.1@12100.91,5175.48 ; U$3.A1@12226.7,5157.45 ccw(c12196.4,5127.15) 12196.4,5170 ccw(c12196.4,5212.85) U$3.A1@12226.7,5182.55
BMS_PWR_STEP: BMS_LATCH_SSR.4 BMS_SSR.3 IMD_SHUTDOWN1.3 | length 1406.2
  Top Layer w16: v1@13369.34,5670.66 ccw(c13355.69,5684.31) 13375,5684.31 ccw(c13394.31,5684.31) v1@13380.66,5670.66 ; v1@13369.34,5745.34 cw(c13355.69,5731.69) 13375,5731.69 cw(c13394.31,5731.69) v1@13380.66,5745.34 ; v1(13375,5665) v1(13375,5751)
  Bottom Layer w16: IMD_SHUTDOWN1.3@12927.95,5558.55 13034.4,5665 v1(13375,5665) ; IMD_SHUTDOWN1.3@12927.95,5578.84 ccw(c12927.95,5627.83) 12962.59,5593.19 ccw(c12997.23,5558.55) IMD_SHUTDOWN1.3@12948.24,5558.55 ; IMD_SHUTDOWN1.3@12927.95,5594.84 ccw(c12927.95,5682.46) 12989.9,5620.5 ccw(c13051.86,5558.55) IMD_SHUTDOWN1.3@12964.24,5558.55 ; BMS_SSR.3@13314.52,5799.76 cw(c13301.29,5786.53) 13320,5786.53 cw(c13338.71,5786.53) BMS_SSR.3@13325.48,5799.76 ; BMS_SSR.3@13320,5813.11 13320,5765 13333,5752 13597,5752 13615,5770 BMS_LATCH_SSR.4@13615,5818.11 ; 13353.27,5752 cw(c13353.27,5729.27) v1@13369.34,5745.34 ; 13358.1,5752 ccw(c13358.1,5767.9) v1@13369.34,5756.66 ; v1@13369.34,5659.34 ccw(c13355.69,5645.69) 13355.69,5665 ccw(c13355.69,5684.31) v1@13369.34,5670.66 ; v1@13380.66,5745.34 cw(c13396.73,5729.27) 13396.73,5752 ; v1@13380.66,5756.66 ccw(c13391.9,5767.9) 13391.9,5752 ; BMS_LATCH_SSR.4@13609.52,5804.76 cw(c13596.29,5791.53) 13615,5791.53 cw(c13633.71,5791.53) BMS_LATCH_SSR.4@13620.48,5804.76
BRAKE_LIGHT: BRAKE_LIGHT_SSR.5 X2.4 X3.4 | length 3907.4
  Top Layer w16: v1@11924.39,3887.71 ccw(c11910.74,3901.36) 11930.05,3901.36 ccw(c11949.36,3901.36) v1@11935.71,3887.71 ; v1(11930.05,3882.05) 11930.05,4237.05 11953,4260 ; BRAKE_LIGHT_SSR.5@11980.75,4247.82 ccw(c11953,4222.31) 11953,4260 ; BRAKE_LIGHT_SSR.5@11980.75,4272.18 cw(c11953,4297.69) 11953,4260 ; BRAKE_LIGHT_SSR.5@12020,4260 11953,4260 ; X3.4@12504.67,3568.38 ccw(c12390.3,3682.75) 12552.05,3682.75 ccw(c12713.8,3682.75) X3.4@12599.43,3568.38 ; X3.4@12515.99,3557.06 ccw(c12428.93,3644.12) 12552.05,3644.12 ccw(c12675.17,3644.12) X3.4@12588.11,3557.06 ; X3.4@12527.3,3545.75 ccw(c12467.55,3605.5) 12552.05,3605.5 ccw(c12636.55,3605.5) X3.4@12576.8,3545.75 ; v1@12546.39,3876.39 cw(c12532.74,3862.74) 12552.05,3862.74 cw(c12571.36,3862.74) v1@12557.71,3876.39 ; X3.4@12552.05,3521 v1(12552.05,3882.05) ; X2.4@13515.65,4319.63 cw(c13452.14,4256.12) 13541.95,4256.12 ; X2.4@13526.96,4330.94 cw(c13490.77,4294.75) 13541.95,4294.75 ; v1@13536.29,3887.71 ccw(c13522.64,3901.36) 13541.95,3901.36 ccw(c13561.26,3901.36) v1@13547.61,3887.71 ; v1(13541.95,3882.05) X2.4@13541.95,4340.47 ; 13541.95,4269.3 cw(c13613.12,4269.3) X2.4@13562.79,4319.63
  Bottom Layer w16: v1(11930.05,3882.05) v1(12552.05,3882.05) v1(13541.95,3882.05) ; v1@11935.71,3876.39 cw(c11949.36,3862.74) 11949.36,3882.05 cw(c11949.36,3901.36) v1@11935.71,3887.71 ; v1@12546.39,3876.39 ccw(c12532.74,3862.74) 12532.74,3882.05 ccw(c12532.74,3901.36) v1@12546.39,3887.71 ; v1@12557.71,3876.39 cw(c12571.36,3862.74) 12571.36,3882.05 cw(c12571.36,3901.36) v1@12557.71,3887.71 ; v1@13536.29,3876.39 ccw(c13522.64,3862.74) 13522.64,3882.05 ccw(c13522.64,3901.36) v1@13536.29,3887.71
BRAKE_LIGHT_CTRL: R10.2 U$3.D12 | length 2550
  Top Layer w16: R10.2@11499.09,4373.35 ccw(c11485.86,4386.58) 11504.57,4386.58 ccw(c11523.28,4386.58) R10.2@11510.05,4373.35 ; R10.2@11504.57,4360 11504.57,4609.57 11626,4731 v1(11626,5436) ; v1@11620.34,5430.34 cw(c11606.69,5416.69) 11626,5416.69 cw(c11645.31,5416.69) v1@11631.66,5430.34
  Bottom Layer w16: v1(11626,5436) 12408,5436 12474,5370 U$3.D12@12865,5370 ; v1@11631.66,5430.34 cw(c11645.31,5416.69) 11645.31,5436 cw(c11645.31,5455.31) v1@11631.66,5441.66 ; U$3.D12@12826.7,5357.45 ccw(c12796.4,5327.15) 12796.4,5370 ccw(c12796.4,5412.85) U$3.D12@12826.7,5382.55
CANH: BUS1.4 BUS2.4 CAN_TRANSCEIVER.7 R15.1 X4.8 | length 3476.8
  Top Layer w16: X4.8@12715.11,7848.96 cw(c12574.49,7843.18) 12674.01,7743.67 ; X4.8@12731.09,7849.62 cw(c12624.06,7845.22) 12699.81,7769.47 cw(c12775.56,7693.72) X4.8@12779.96,7800.75 ; X4.8@12747.08,7850.27 cw(c12673.63,7847.25) 12725.61,7795.27 cw(c12777.59,7743.29) X4.8@12780.61,7816.74 ; BUS2.4@12754.7,6955.39 ccw(c12697.78,7012.31) 12778.27,7012.31 ccw(c12858.76,7012.31) BUS2.4@12801.84,6955.39 ; BUS2.4@12766.01,6944.08 ccw(c12736.41,6973.68) 12778.27,6973.68 ccw(c12820.13,6973.68) BUS2.4@12790.53,6944.08 ; BUS2.4@12778.27,6931.82 12778.27,7461.73 12674,7566 12674,7743.66 ; X4.8@12779.3,7784.77 ccw(c12773.52,7644.15) 12674.01,7743.67 ; X4.8@12782.05,7851.71 12674,7743.66 ; BUS1.4@13184.7,6955.39 ccw(c13127.78,7012.31) 13208.27,7012.31 ccw(c13288.76,7012.31) BUS1.4@13231.84,6955.39 ; BUS1.4@13196.01,6944.08 ccw(c13166.41,6973.68) 13208.27,6973.68 ccw(c13250.13,6973.68) BUS1.4@13220.53,6944.08 ; v1@13202.61,7056.61 cw(c13188.96,7042.96) 13208.27,7042.96 cw(c13227.58,7042.96) v1@13213.93,7056.61 ; BUS1.4@13208.27,6931.82 v1(13208.27,7062.27)
  Bottom Layer w16: BUS2.4@12778.27,6931.82 12778.27,6941 R15.1@12837.57,7000.3 ; BUS2.4@12778.27,6965.16 ccw(c12778.27,7023.48) 12819.51,6982.24 ; BUS2.4@12795.59,6932.6 cw(c12851.42,6935.12) 12811.9,6974.63 ; BUS2.4@12811.57,6933.32 cw(c12900.53,6937.33) R15.1@12837.57,7000.3 ; 12818.1,6980.83 ccw(c12789.81,7009.13) R15.1@12829.82,7009.13 ; R15.1@12837.57,7032.62 ccw(c12837.57,7064.42) 12860.05,7041.94 ; 13179.95,7066 cw(c13179.95,7033.95) v1@13202.61,7056.61 ; v1@13213.93,7056.61 cw(c13236.59,7033.95) 13236.59,7066 ; CAN_TRANSCEIVER.7@13690,6917.36 13690,7044 13668,7066 13077,7066 13075.62,7064.62 12882.74,7064.62 12837.57,7019.45 R15.1@12837.57,7017 R15.1@12837.57,7000.3
CANL: BUS1.3 BUS2.3 CAN_TRANSCEIVER.6 R15.2 X4.7 | length 3269.1
  Top Layer w16: X4.7@12520.21,7910.66 ccw(c12491.38,7964.05) 12552.05,7964.05 ; X4.7@12527.81,7896.58 ccw(c12505.87,7937.22) 12552.05,7937.22 ccw(c12598.23,7937.22) X4.7@12576.29,7896.58 ; X4.7@12552.05,7851.71 12552.05,7964.05 ; X4.7@12583.89,7910.66 cw(c12612.72,7964.05) 12552.05,7964.05 ; BUS2.3@12920.05,6955.39 ccw(c12863.13,7012.31) 12943.62,7012.31 ccw(c13024.11,7012.31) BUS2.3@12967.19,6955.39 ; BUS2.3@12931.36,6944.08 ccw(c12901.76,6973.68) 12943.62,6973.68 ccw(c12985.48,6973.68) BUS2.3@12955.88,6944.08 ; BUS2.3@12943.62,6931.82 12943.62,7429.38 12902,7471 12902,7962 12885,7979 12567,7979 12552.05,7964.05
  Bottom Layer w16: R15.2@12902.95,7003.65 cw(c12877.65,6978.35) 12913.43,6978.35 ; 12913.43,6976.57 ccw(c12959.62,6976.57) BUS2.3@12944.07,6933.08 ; R15.2@12913.43,6999.28 ccw(c12967.74,6999.28) BUS2.3@12949.46,6948.15 ; R15.2@12913.91,7030.35 ccw(c12934.07,7050.52) 12934.07,7022 ; BUS2.3@12943.62,6931.82 12913.43,6962.01 R15.2@12913.43,7022 ; BUS2.3@12954.84,6963.21 cw(c12975.86,7022) R15.2@12913.43,7022 ; BUS1.3@13356.19,6960.24 ccw(c13337.09,6991.38) 13373.62,6991.38 ; BUS1.3@13373.62,6931.82 13373.62,6991.38 ; BUS1.3@13391.05,6960.24 cw(c13410.15,6991.38) 13373.62,6991.38 ; CAN_TRANSCEIVER.6@13640,6917.36 13640,6994 13616,7018 13400.24,7018 13373.62,6991.38 ; R15.2@12913.43,7022 13343,7022 13373.62,6991.38
FAN1-: U$2.2 U$6.P X3.7 | length 5653.3
  Top Layer w24: U$6.P@14062,6035 14413,6035 14456,5992 14456,4618 14394.18,4556.18 U$2.2@14394.18,4428.28 14394.18,4235.18 14118,3959 v1(14118,2994) ; U$6.P@14144.42,6005.83 cw(c14214.84,5935.41) 14214.84,6035 cw(c14214.84,6134.59) U$6.P@14144.42,6064.17 ; U$2.2@14376.5,4410.6 cw(c14333.82,4367.92) 14394.18,4367.92 cw(c14454.54,4367.92) U$2.2@14411.86,4410.6 ; U$2.2@14376.5,4445.96 ccw(c14333.82,4488.64) 14394.18,4488.64 ccw(c14454.54,4488.64) U$2.2@14411.86,4445.96
  Bottom Layer w24: X3.7@12967.5,3240.45 cw(c12859.95,3132.9) 13012.05,3132.9 cw(c13164.15,3132.9) X3.7@13056.6,3240.45 ; X3.7@12984.47,3257.42 cw(c12917.9,3190.85) 13012.05,3190.85 cw(c13106.2,3190.85) X3.7@13039.63,3257.42 ; X3.7@13012.05,3285 13012.05,3038.95 13057,2994 v1(14118,2994)
FAN2-: U$4.2 U$7.P X3.8 | length 4241.9
  Top Layer w24: X3.8@12782.05,3285 12895,3397.95 v3(12895,3733) ; X3.8@12782.05,3324 ccw(c12782.05,3418.15) 12848.63,3351.58 ccw(c12915.2,3285) X3.8@12821.05,3285 ; X3.8@12782.05,3348 ccw(c12782.05,3500.1) 12889.6,3392.55 ccw(c12997.15,3285) X3.8@12845.05,3285 ; U$7.P@13975.21,5156.19 cw(c13886.4,5067.38) 14012,5067.38 ; U$7.P@13992.18,5173.16 cw(c13944.34,5125.32) 14012,5125.32 ; v3(14012,3736) 14012,5139.73 U$7.P@14057.63,5185.36 ; 14012,5104.17 cw(c14085.57,5104.17) U$7.P@14033.55,5156.19
  Bottom Layer w24: v3(12895,3733) 14372,3733 14394.18,3755.18 ; 13991.48,3733 ccw(c13991.48,3756.52) v3@14008.11,3739.89 ; v3@14015.89,3739.89 ccw(c14032.52,3756.52) 14032.52,3733 ; U$4.2@14377.73,3791.42 cw(c14346.05,3755.18) 14394.18,3755.18 ; U$4.2@14394.18,3810.24 14394.18,3755.18 ; U$4.2@14410.63,3791.42 ccw(c14442.31,3755.18) 14394.18,3755.18
FAN3-: U$5.2 X3.9 | length 2853.3
  Bottom Layer w24: X3.9@12507.5,3240.45 cw(c12399.95,3132.9) 12552.05,3132.9 cw(c12704.15,3132.9) X3.9@12596.6,3240.45 ; X3.9@12524.47,3257.42 cw(c12457.9,3190.85) 12552.05,3190.85 cw(c12646.2,3190.85) X3.9@12579.63,3257.42 ; X3.9@12552.05,3285 12552.05,2957.95 12582,2928 14353,2928 14394.18,2969.18 U$5.2@14394.18,3142.21 ; U$5.2@14376.5,3124.54 cw(c14333.82,3081.86) 14394.18,3081.86 cw(c14454.54,3081.86) U$5.2@14411.86,3124.54
GND: BUS1.2 BUS2.2 C1.1 C2.1 C3.2 C4.1 C5.1 C6.1 CAN_TRANSCEIVER.2 CAN_TRANSCEIVER.8 D4.A D5.A D6.A D7.A D8.A IMD_SHUTDOWN1.COIL+ IMD_SHUTDOWN.COIL+ LED1.C LED2.C LED3.C LED4.C LED5.C LED6.C LED7.C LED8.C LED9.C LED14.C LED15.C POWER.2 R2.2 R4.2 R6.2 R8.2 R9.1 R18.2 R19.2 R22.1 R23.1 R27.2 R28.2 REG1.1 REG2.2 REG2.4 REG.2 REG.4 U$1.2 U$3.AGND U$3.GND U$6.1 U$7.1 U$8.3 U$9.3 X1.2 X4.3 X4.6 XB.10 | length 4716.1
  Top Layer w24: v2(13533,3217) 13533,3820
  Top Layer w50: X4.3@12782.05,7615.71 12782.05,7568.95 12837,7514 12837,7305
  Bottom Layer w16: IMD_SHUTDOWN1.COIL+@13690.29,5584.21 ccw(c13630.63,5643.87) 13715,5643.87 ; IMD_SHUTDOWN.COIL+@13690.29,6219.21 ccw(c13630.63,6278.87) 13715,6278.87 ; IMD_SHUTDOWN1.COIL+@13701.6,5572.9 ccw(c13669.26,5605.24) 13715,5605.24 ; IMD_SHUTDOWN.COIL+@13701.6,6207.9 ccw(c13669.26,6240.24) 13715,6240.24 ; D5.A@13709.52,5659.08 cw(c13696.29,5645.85) 13715,5645.85 cw(c13733.71,5645.85) D5.A@13720.48,5659.08 ; D6.A@13709.52,6299.08 cw(c13696.29,6285.85) 13715,6285.85 cw(c13733.71,6285.85) D6.A@13720.48,6299.08 ; 13715,5609.83 ccw(c13767.23,5609.83) IMD_SHUTDOWN1.COIL+@13730.3,5572.9 ; 13715,5648.46 ccw(c13805.86,5648.46) IMD_SHUTDOWN1.COIL+@13741.61,5584.21 ; D5.A@13715,5664.56 13715,5559.5 IMD_SHUTDOWN1.COIL+@13715.95,5558.55 ; 13715,6244.83 ccw(c13767.23,6244.83) IMD_SHUTDOWN.COIL+@13730.3,6207.9 ; 13715,6283.46 ccw(c13805.86,6283.46) IMD_SHUTDOWN.COIL+@13741.61,6219.21 ; D6.A@13715,6304.56 13715,6194.5 IMD_SHUTDOWN.COIL+@13715.95,6193.55
  Bottom Layer w24: v1(11909,4853) 11973.35,4853 12015.35,4895 R8.2@12019.57,4895 ; v2(13533,3217) 14163,3217 14240,3294 U$9.3@14240,3397.64 ; v2(13900,4048) 14074,4048 14141,4115 14233.43,4115 14250,4098.43 U$8.3@14250,4042.64 ; U$7.1@14140.63,5421.36 14273.64,5421.36 14300,5395 D8.A@14300,5220.44 ; U$6.1@14145,6271 14261,6271 14290,6242 D7.A@14290,6075.44 ; U$7.1@14198.72,5402.27 cw(c14244.81,5356.18) 14244.81,5421.36 cw(c14244.81,5486.54) U$7.1@14198.72,5440.45 ; U$6.1@14203.09,6251.91 cw(c14249.18,6205.82) 14249.18,6271 cw(c14249.18,6336.18) U$6.1@14203.09,6290.09
  Bottom Layer w80: 12091,7293 12091,7851.71 X4.6@12322.05,7851.71
  other v1: 11919,4736 11771,5172
  other v2: 13720,3914 11812,4028 13762,4038 11644,4070 13380,4104 13115,4129 13948,4196 12690,4200 11870,4236 12605,4344 11894,4374 12560,4518 13812,4519 11622,4615 14284,4632 13814,4695 11500,4697 11546,4828 12430,5119 13435,5193 12496,5223 14044,5293 11548,5351 12170,5548 12444,5548 12078,5843 12484,5845 11629,5849 11652,6158 12492,6334 11684,6615 11826,6777 12164,6797 13537,6813 12865,6839 13203,6843 11628,6937 13733,7067
GND1: U$2.3 U$4.3 U$5.3 U$6.S U$7.S X3.10 | length 6067.6
  Top Layer w50: X3.10@12286.69,3249.64 cw(c12201.34,3164.29) 12322.05,3164.29 cw(c12442.76,3164.29) X3.10@12357.41,3249.64 ; X3.10@12322.05,3285 12322.05,2827.95 12355,2795 14394,2795 14494.18,2895.18 U$5.3@14494.18,3142.21 U$4.3@14494.18,3810.24 U$2.3@14494.18,4428.28 14494.18,4498.18 14809,4813 14809,5757 14767,5799 U$6.S@14625,5799
GPIO_1: GPIO_SSR1.3 U$10.P$2 X2.6 X3.6 | length 3562
  Top Layer w16: X3.6@13242.05,3285 13436,3478.95 v1@13436,4570.69 ; X3.6@13242.05,3320 ccw(c13242.05,3404.5) 13301.8,3344.75 ccw(c13361.55,3285) X3.6@13277.05,3285 ; X3.6@13242.05,3336 ccw(c13242.05,3459.12) 13329.11,3372.06 ccw(c13416.17,3285) X3.6@13293.05,3285 ; X3.6@13242.05,3352 ccw(c13242.05,3513.75) 13356.43,3399.38 ccw(c13470.8,3285) X3.6@13309.05,3285 ; 13436,4555.03 cw(c13468.97,4555.03) v1@13445.66,4578.34 ; v1@13440,4592 ccw(c13440,4633.79) 13469.55,4604.24 ; v1@13444.66,4579.35 X2.6@13539.22,4673.91 13628,4762.69 v1(13628,4996) ; X2.6@13505.88,4673.91 cw(c13425.39,4673.91) 13482.31,4617 cw(c13539.22,4560.08) X2.6@13539.22,4640.57 ; X2.6@13521.88,4673.91 cw(c13480.02,4673.91) 13509.62,4644.31 cw(c13539.22,4614.71) X2.6@13539.22,4656.57 ; X2.6@13539.22,4691.25 ccw(c13539.22,4733.11) 13568.82,4703.51 ccw(c13598.42,4673.91) X2.6@13556.56,4673.91 ; X2.6@13539.22,4707.25 ccw(c13539.22,4787.74) 13596.13,4730.82 ccw(c13653.05,4673.91) X2.6@13572.56,4673.91 ; v1@13622.34,4990.34 cw(c13608.69,4976.69) 13628,4976.69 cw(c13647.31,4976.69) v1@13633.66,4990.34
  Bottom Layer w16: U$10.P$2@13080,4630 13126,4584 ; U$10.P$2@13081.55,4601.04 cw(c13084.66,4542.67) 13126,4584 ; U$10.P$2@13108.96,4628.45 ccw(c13167.33,4625.34) 13126,4584 ; v1@13434.34,4578.34 ccw(c13420.69,4564.69) 13420.69,4584 ccw(c13420.69,4603.31) v1@13434.34,4589.66 ; v1(13440,4584) 13126,4584 ; GPIO_SSR1.3@13543.11,5000 13547.11,4996 v1(13628,4996) ; GPIO_SSR1.3@13556.46,5005.48 ccw(c13579.35,5028.36) 13579.35,4996 ; v1@13622.34,4990.34 ccw(c13608.69,4976.69) 13608.69,4996 ccw(c13608.69,5015.31) v1@13622.34,5001.66
GPIO_2: GPIO_SSR2.3 U$11.P$2 X4.9 | length 6041.8
  Top Layer w16: v1@11546.34,4570.66 ccw(c11532.69,4584.31) 11552,4584.31 ccw(c11571.31,4584.31) v1@11557.66,4570.66 ; v1(11552,4565) 11552,4610 11668,4726 11668,5487 11871,5690 11871,5986.91 11875,5990.91 11875,6273 11938,6336 11938,7184 v1(11932,7190) ; v1@11926.34,7184.34 cw(c11898.2,7156.2) 11938,7156.2 ; X4.9@13012.05,7851.71 13117,7746.76 ; X4.9@13014.24,7816.78 cw(c13018.53,7748.55) 13066.87,7796.89 cw(c13115.21,7845.23) X4.9@13046.98,7849.52 ; X4.9@13015.25,7800.81 cw(c13021.49,7701.38) 13091.93,7771.83 cw(c13162.38,7842.27) X4.9@13062.95,7848.51 ; X4.9@13016.25,7784.84 cw(c13024.45,7654.22) 13116.99,7746.77 ; X4.9@13078.92,7847.51 ccw(c13209.54,7839.31) 13116.99,7746.77 ; v1@13111.34,7195.66 ccw(c13097.69,7209.31) 13117,7209.31 ccw(c13136.31,7209.31) v1@13122.66,7195.66 ; v1(13117,7190) 13117,7746.76
  Bottom Layer w16: v1(11552,4565) GPIO_SSR2.3@11686.89,4565 ; v1@11557.66,4559.34 cw(c11571.31,4545.69) 11571.31,4565 cw(c11571.31,4584.31) v1@11557.66,4570.66 ; U$11.P$2@11595.95,7108.55 11677.4,7190 v1(11932,7190) v1(13117,7190) ; U$11.P$2@11595.95,7137.55 ccw(c11595.95,7207.56) 11645.46,7158.06 ccw(c11694.96,7108.55) U$11.P$2@11624.95,7108.55 ; GPIO_SSR2.3@11673.54,4559.52 ccw(c11660.31,4546.29) 11660.31,4565 ccw(c11660.31,4583.71) GPIO_SSR2.3@11673.54,4570.48 ; v1@11926.34,7184.34 ccw(c11912.69,7170.69) 11912.69,7190 ccw(c11912.69,7209.31) v1@11926.34,7195.66 ; v1@11937.66,7184.34 cw(c11951.31,7170.69) 11951.31,7190 cw(c11951.31,7209.31) v1@11937.66,7195.66 ; v1@13111.34,7184.34 ccw(c13097.69,7170.69) 13097.69,7190 ccw(c13097.69,7209.31) v1@13111.34,7195.66
GPIO_3: X4.10